# EAGLE board Photon-Battery-Shield-Panel-v10 (EAGLE 7.3.0), part 1 of 2
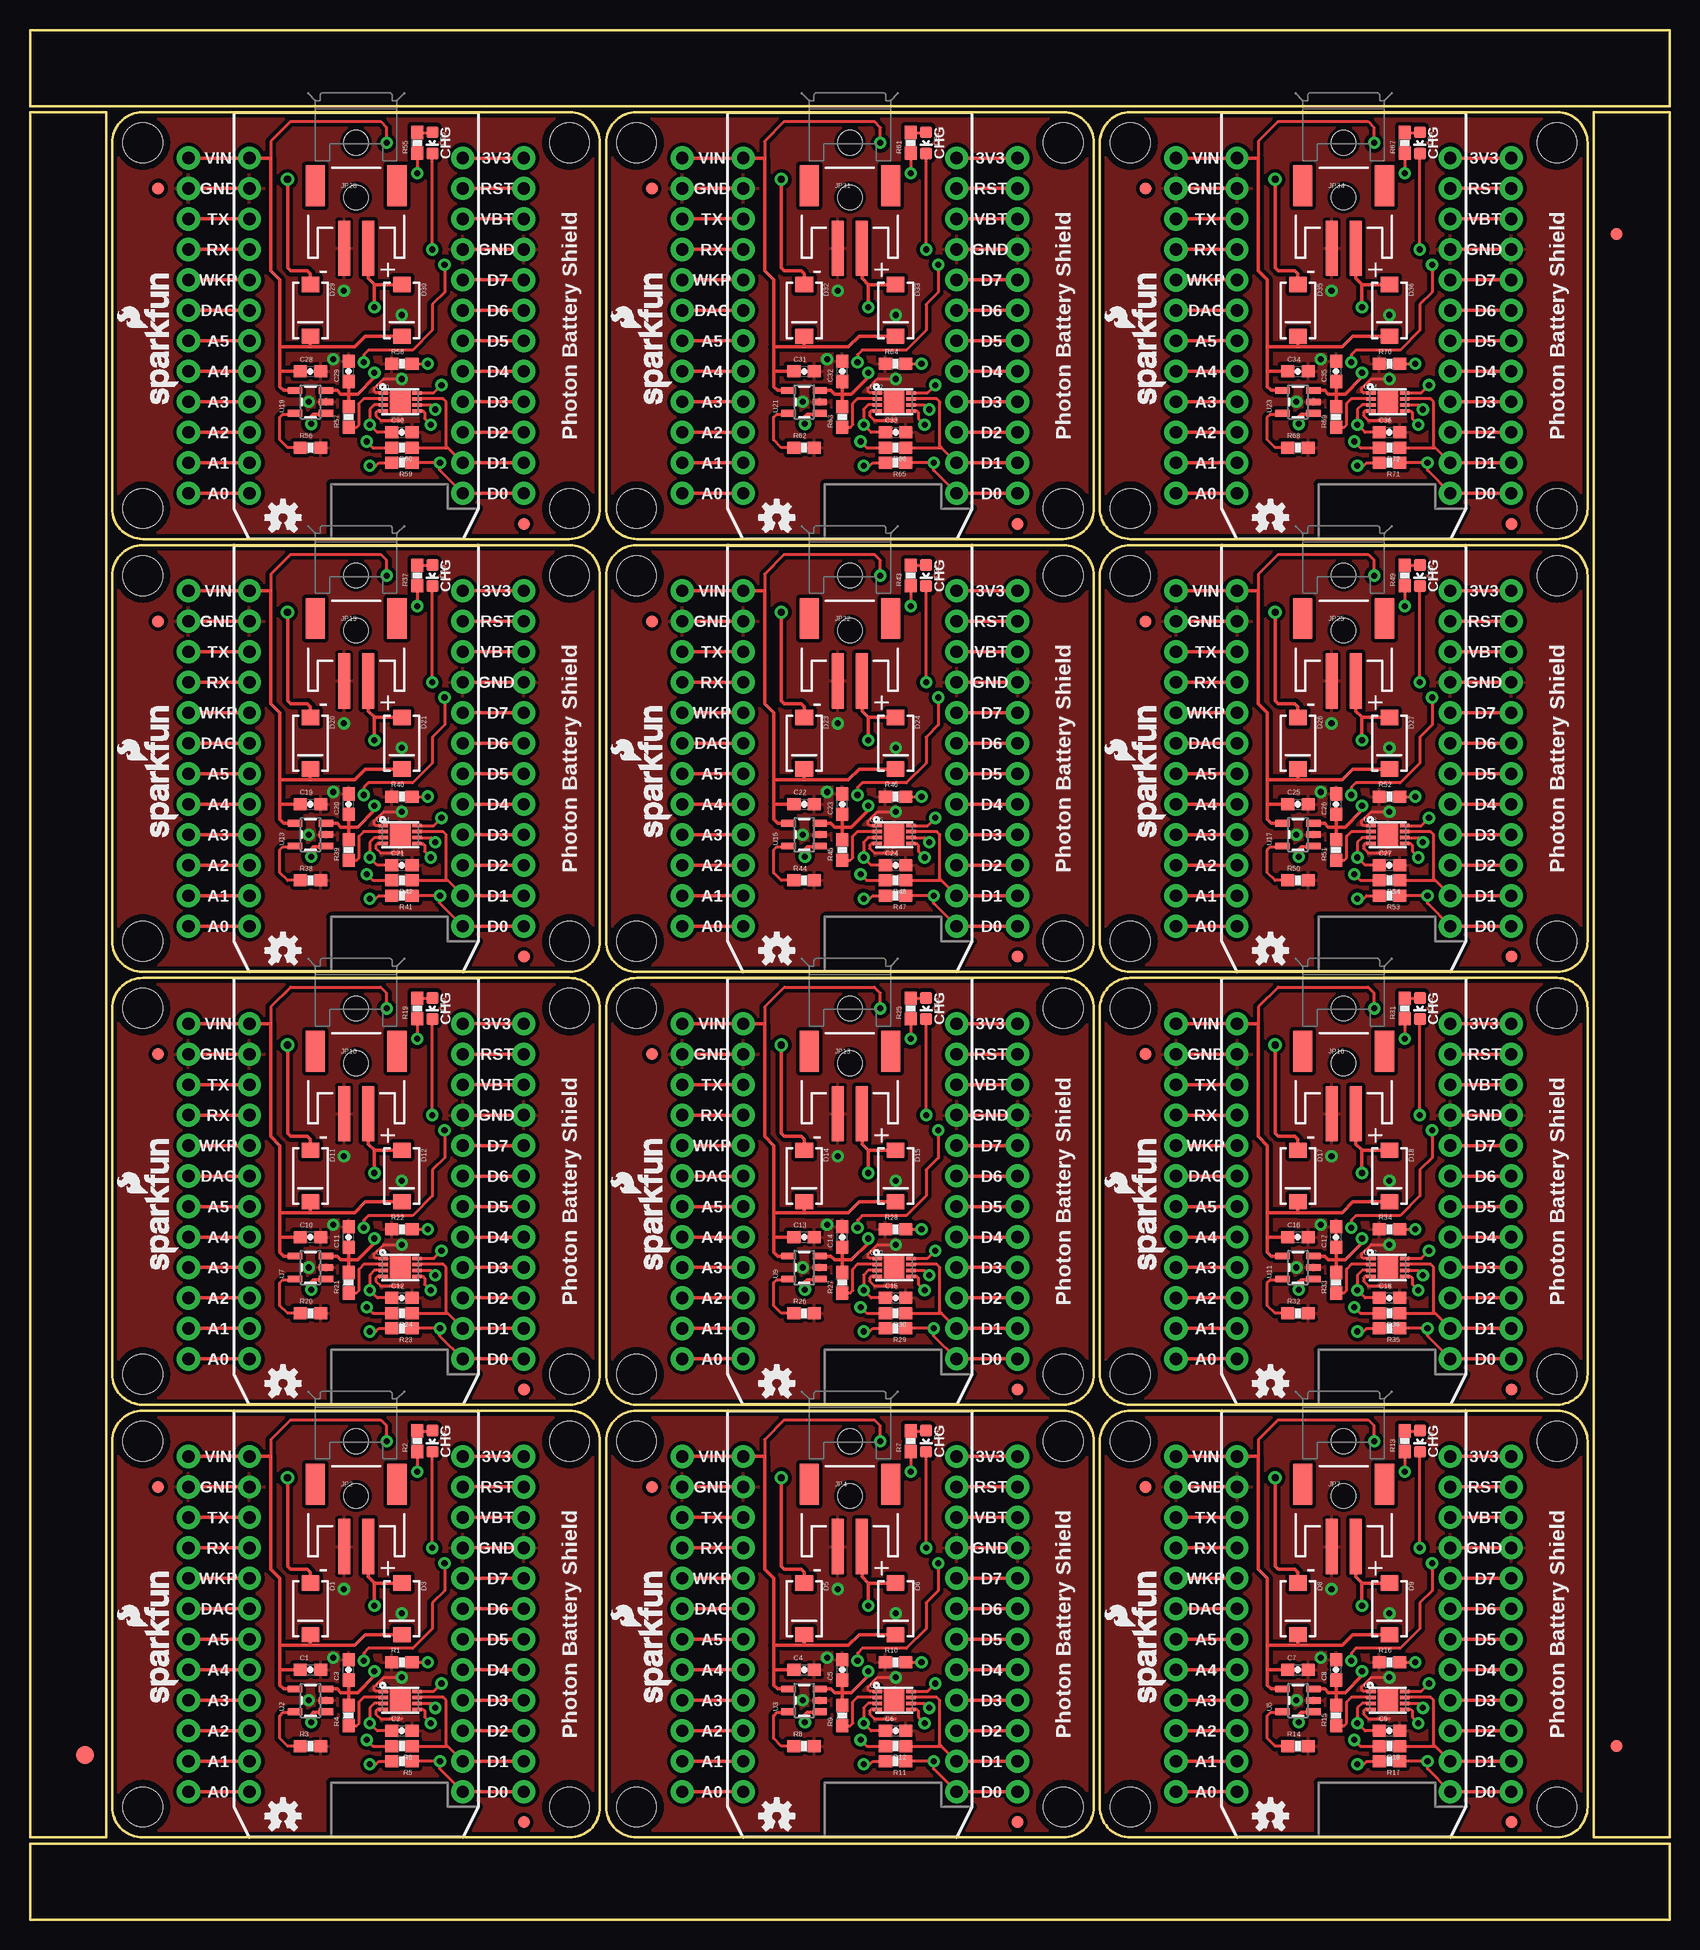
[diagram p0: board, top side]
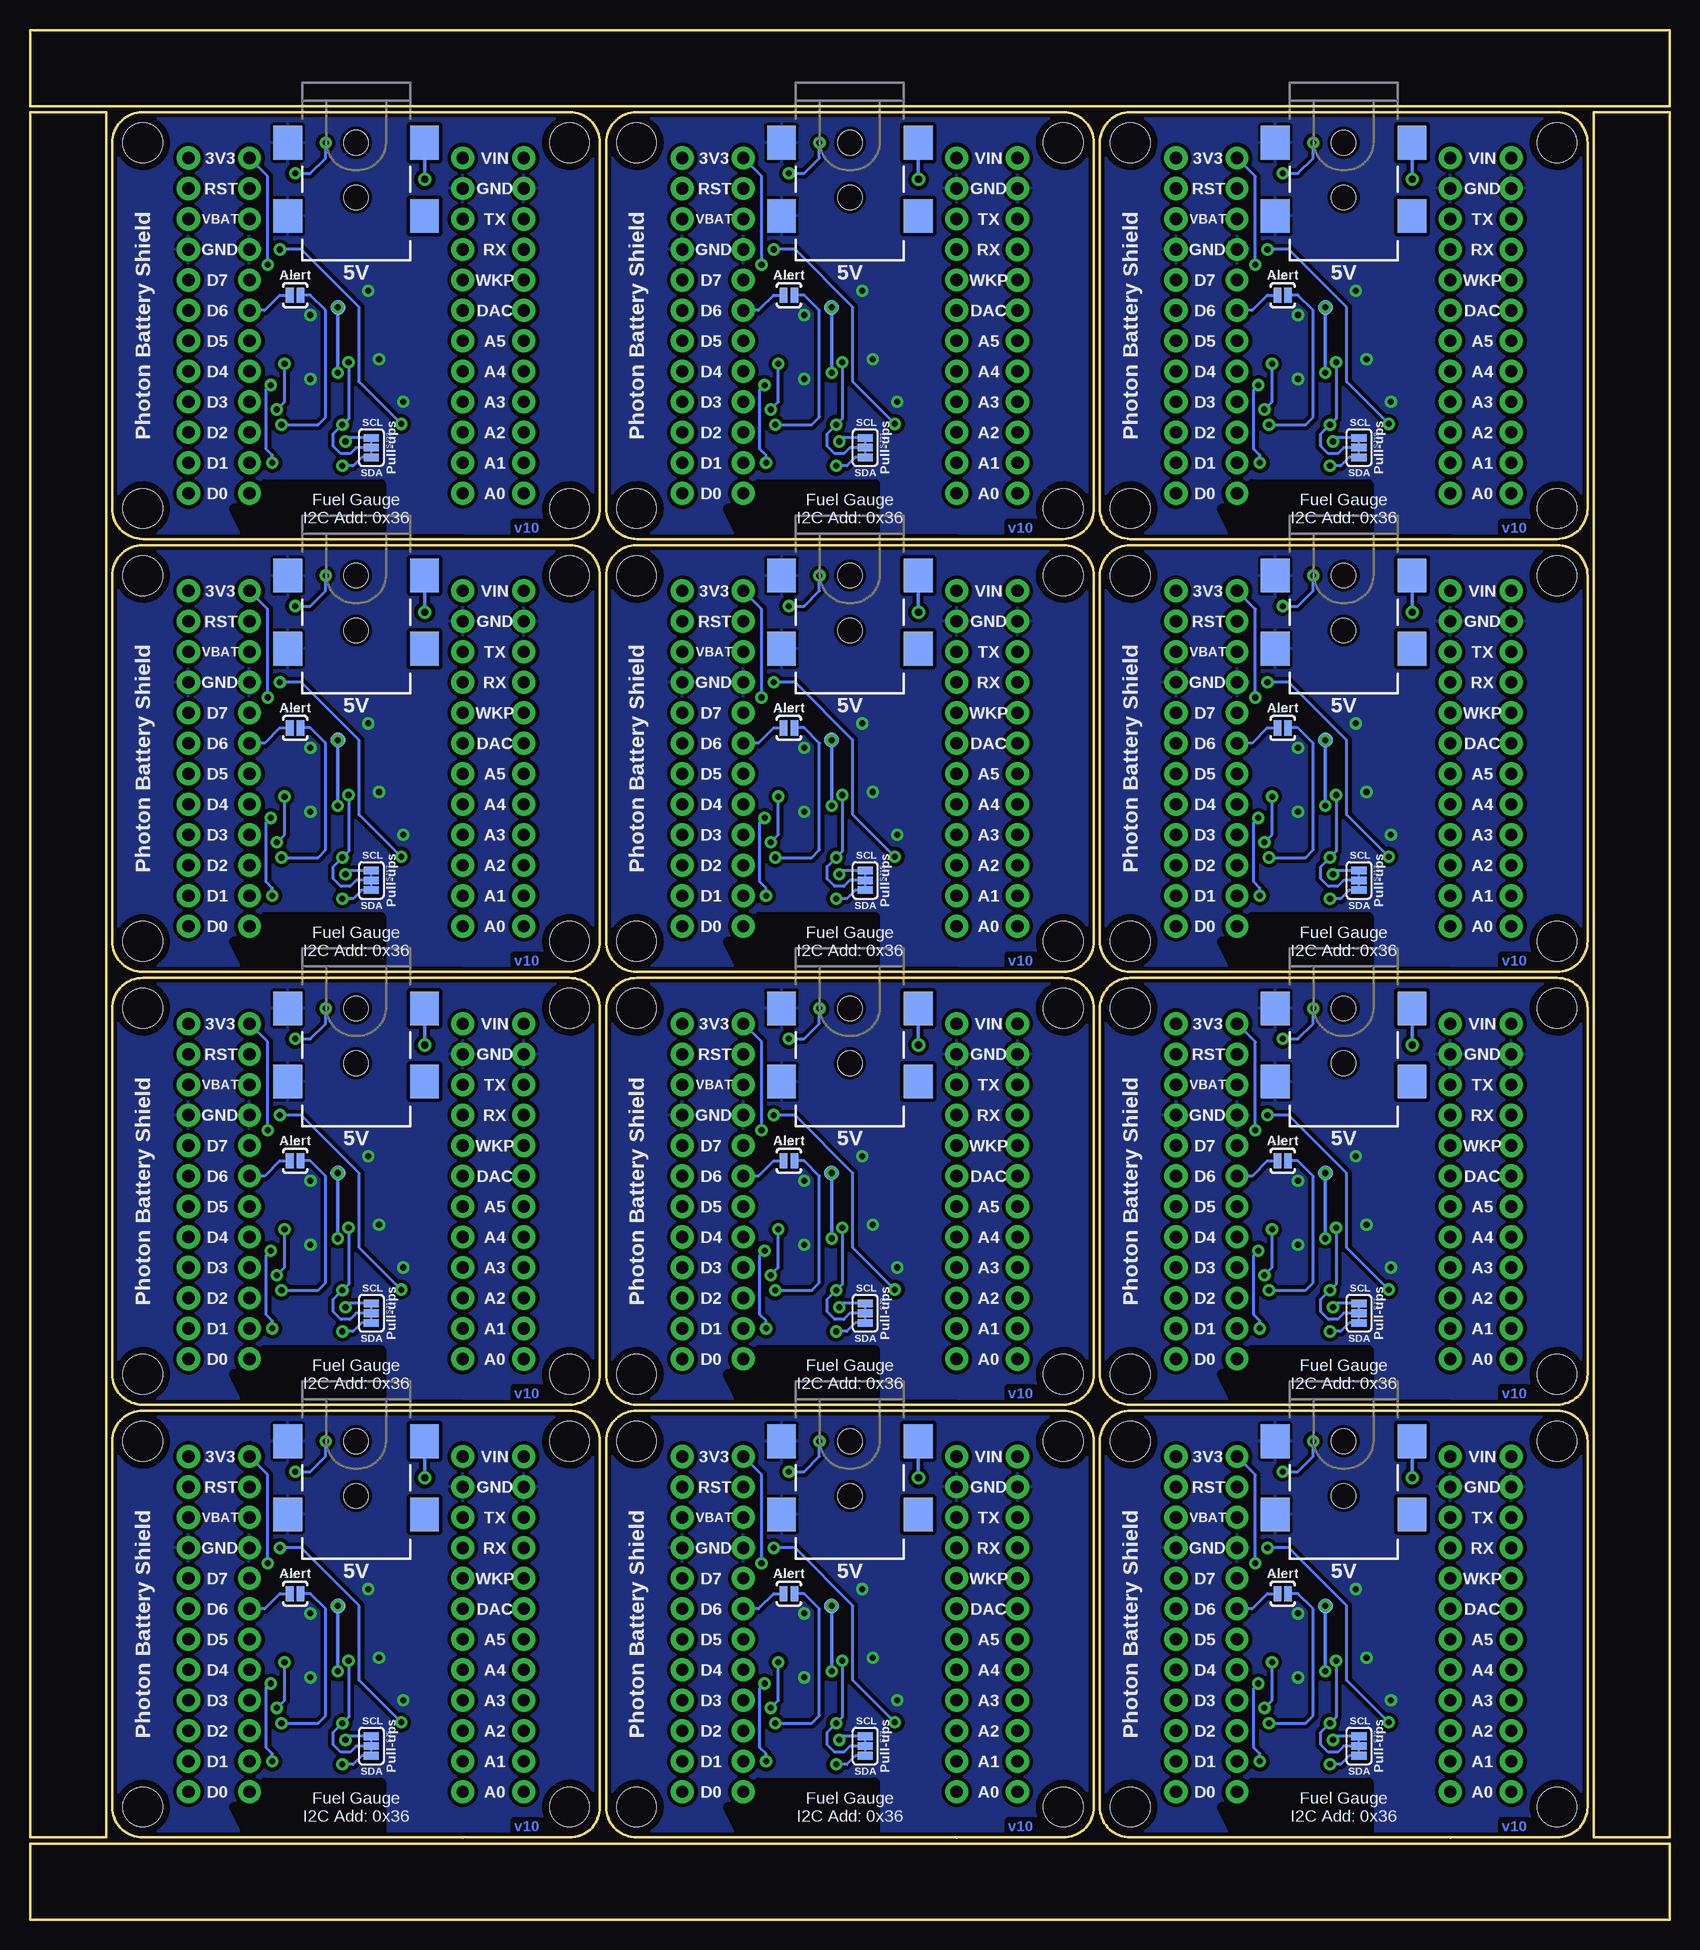
[diagram p1: board, bottom side, seen from below]

Size 136.65 x 157.48 mm. Coordinates in mm from the lower left corner, seen from the top.
Outline: 18.29,6.85 36.07,6.86
Outline: 59.44,6.85 77.22,6.86
Outline: 100.58,6.85 118.36,6.86
Outline: 18.29,42.92 36.07,42.93
Outline: 59.44,42.92 77.22,42.93
Outline: 100.58,42.92 118.36,42.93
Outline: 18.29,78.98 36.07,78.99
Outline: 59.44,78.98 77.22,78.99
Outline: 100.58,78.98 118.36,78.99
Outline: 18.29,115.05 36.07,115.06
Outline: 59.44,115.05 77.22,115.06
Outline: 100.58,115.05 118.36,115.06
Outline: 9.4,42.42 44.96,42.42 arc-90 47.5,39.88 47.5,9.4 arc-90 44.96,6.86 9.4,6.86 arc-90 6.86,9.4 6.86,39.88 arc-90 9.4,42.42
Outline: 50.55,42.42 86.11,42.42 arc-90 88.65,39.88 88.65,9.4 arc-90 86.11,6.86 50.55,6.86 arc-90 48.01,9.4 48.01,39.88 arc-90 50.55,42.42
Outline: 91.69,42.42 127.25,42.42 arc-90 129.79,39.88 129.79,9.4 arc-90 127.25,6.86 91.69,6.86 arc-90 89.15,9.4 89.15,39.88 arc-90 91.69,42.42
Outline: 9.4,78.49 44.96,78.49 arc-90 47.5,75.95 47.5,45.47 arc-90 44.96,42.93 9.4,42.93 arc-90 6.86,45.47 6.86,75.95 arc-90 9.4,78.49
Outline: 50.55,78.49 86.11,78.49 arc-90 88.65,75.95 88.65,45.47 arc-90 86.11,42.93 50.55,42.93 arc-90 48.01,45.47 48.01,75.95 arc-90 50.55,78.49
Outline: 91.69,78.49 127.25,78.49 arc-90 129.79,75.95 129.79,45.47 arc-90 127.25,42.93 91.69,42.93 arc-90 89.15,45.47 89.15,75.95 arc-90 91.69,78.49
Outline: 9.4,114.55 44.96,114.55 arc-90 47.5,112.01 47.5,81.53 arc-90 44.96,78.99 9.4,78.99 arc-90 6.86,81.53 6.86,112.01 arc-90 9.4,114.55
Outline: 50.55,114.55 86.11,114.55 arc-90 88.65,112.01 88.65,81.53 arc-90 86.11,78.99 50.55,78.99 arc-90 48.01,81.53 48.01,112.01 arc-90 50.55,114.55
Outline: 91.69,114.55 127.25,114.55 arc-90 129.79,112.01 129.79,81.53 arc-90 127.25,78.99 91.69,78.99 arc-90 89.15,81.53 89.15,112.01 arc-90 91.69,114.55
Outline: 9.4,150.62 44.96,150.62 arc-90 47.5,148.08 47.5,117.6 arc-90 44.96,115.06 9.4,115.06 arc-90 6.86,117.6 6.86,148.08 arc-90 9.4,150.62
Outline: 50.55,150.62 86.11,150.62 arc-90 88.65,148.08 88.65,117.6 arc-90 86.11,115.06 50.55,115.06 arc-90 48.01,117.6 48.01,148.08 arc-90 50.55,150.62
Outline: 91.69,150.62 127.25,150.62 arc-90 129.79,148.08 129.79,117.6 arc-90 127.25,115.06 91.69,115.06 arc-90 89.15,117.6 89.15,148.08 arc-90 91.69,150.62
Outline: 6.35,6.86 6.35,150.62 0,150.62 0,6.86 6.35,6.86
Outline: 0,0 136.65,0 136.65,6.35 0,6.35 0,0
Outline: 136.65,6.86 136.65,150.62 130.3,150.62 130.3,6.86 136.65,6.86
Outline: 136.65,157.48 0,157.48 0,151.13 136.65,151.13 136.65,157.48
Copper layers (1*16): Top 0.035mm / dielectric 1.5mm / Bottom 0.035mm
Design rules "SparkFun-2-layer": minimum track width 7mil, minimum drill 15mil, track to track 8mil, track to pad 8mil, pad to pad 8mil, via to via 8mil, smd to smd 8mil, copper to edge 8mil, drill to drill 8mil, minimum pad ring 12mil, minimum via ring 10mil, stop-mask expansion 4mil, vias tented up to drill 20mil, thermal gap 10mil
tRestrict: 24 lines

## Footprints (pad centres in the part's own frame; a part is rotated, then mirrored left to right if it is on the bottom)
0603-CAP = smd 1.1 x 1: 1 -0.85,0; 2 0.85,0
SMA-DIODE = smd 1.27 x 1.47: A -2.15,0; C 2.15,0
LED-0603 = smd 1 x 1: A 0,-0.877; C 0,0.877
FIDUCIAL-1.5X3 = smd 1.5 x 1.5: 1 0,0
FIDUCIAL-1X2 = smd 1 x 1: 1 0,0
POWER_JACK_SMD = smd 2.8 x 2.4: GND 0,-5.7; P$4 6.1,-5.7; VIN0 0,5.7; VIN1 6.1,5.7 | hole 2.032: 0,0; 4.572,0
JST-2-SMD = smd 1 x 4.6: 1 -1,-3.7; 2 1,-3.7 | smd 1.6 x 3.4: NC1 -3.4,1.5; NC2 3.4,1.5
SPARK_PHOTON_TEMPLATE_WIDE = drill 1.016 pad 1.905: 1 1.27,31.75; 2 1.27,29.21; 3 1.27,26.67; 4 1.27,24.13; 5 1.27,21.59; 6 1.27,19.05; 7 1.27,16.51; 8 1.27,13.97; 9 1.27,11.43; 10 1.27,8.89; 11 1.27,6.35; 12 1.27,3.81; 13 19.05,3.81; 14 19.05,6.35; 15 19.05,8.89; 16 19.05,11.43; 17 19.05,13.97; 18 19.05,16.51; 19 19.05,19.05; 20 19.05,21.59; 21 19.05,24.13; 22 19.05,26.67; 23 19.05,29.21; 24 19.05,31.75 | drill 1.016 pad 1.93: 3V3 24.13,31.75; A0 -3.81,3.81; A1 -3.81,6.35; A2 -3.81,8.89; A3 -3.81,11.43; A4 -3.81,13.97; A5 -3.81,16.51; D0 24.13,3.81; D1 24.13,6.35; D2 24.13,8.89; D3 24.13,11.43; D4 24.13,13.97; D5 24.13,16.51; D6 24.13,19.05; D7 24.13,21.59; DAC -3.81,19.05; GND@0 -3.81,29.21; GND@2 24.13,24.13; RST 24.13,29.21; RX -3.81,24.13; TX -3.81,26.67; VBAT 24.13,26.67; VIN -3.81,31.75; WKP -3.81,21.59 | hole 3.302: -7.62,33.02; 27.94,33.02; -7.62,2.54; 27.94,2.54
0603-RES = smd 1.1 x 1: 1 -0.85,0; 2 0.85,0
PAD-JUMPER-2-NO_YES_SILK = smd 0.635 x 1.27: 1 -0.45,0; 2 0.45,0
PAD-JUMPER-3-3OF3_NC_BY_TRACE_YES_SILK_FULL_BOX = smd 0.635 x 1.27: 1 -0.813,0; 2 0,0; 3 0.813,0
PAD.03X.05 = smd 1.27 x 1.27: P$1 0,0
TDFN-8 = smd 0.8 x 0.3: 1 -1.4,0.75; 2 -1.4,0.25; 3 -1.4,-0.25; 4 -1.4,-0.75; 5 1.4,-0.75; 6 1.4,-0.25; 7 1.4,0.25; 8 1.4,0.75 | smd 1.73 x 1.88: EP 0,0
SOT23-5 = smd 0.55 x 1.2: 1 -0.95,-1.3; 2 0,-1.3; 3 0.95,-1.3; 4 0.95,1.3; 5 -0.95,1.3

## Placement (x,y rotation side)
C1  4.7uF  [0603-CAP]  23.37,20.83 0 top
C2  1.0uF  [0603-CAP]  30.99,15.75 0 top
C3  4.7uF  [0603-CAP]  26.54,20.83 90 top
C4  4.7uF  [0603-CAP]  64.52,20.83 0 top
C5  4.7uF  [0603-CAP]  67.69,20.83 90 top
C6  1.0uF  [0603-CAP]  72.14,15.75 0 top
C7  4.7uF  [0603-CAP]  105.66,20.83 0 top
C8  4.7uF  [0603-CAP]  108.84,20.83 90 top
C9  1.0uF  [0603-CAP]  113.28,15.75 0 top
C10  4.7uF  [0603-CAP]  23.37,56.9 0 top
C11  4.7uF  [0603-CAP]  26.54,56.9 90 top
C12  1.0uF  [0603-CAP]  30.99,51.82 0 top
C13  4.7uF  [0603-CAP]  64.52,56.9 0 top
C14  4.7uF  [0603-CAP]  67.69,56.9 90 top
C15  1.0uF  [0603-CAP]  72.14,51.82 0 top
C16  4.7uF  [0603-CAP]  105.66,56.9 0 top
C17  4.7uF  [0603-CAP]  108.84,56.9 90 top
C18  1.0uF  [0603-CAP]  113.28,51.82 0 top
C19  4.7uF  [0603-CAP]  23.37,92.96 0 top
C20  4.7uF  [0603-CAP]  26.54,92.96 90 top
C21  1.0uF  [0603-CAP]  30.99,87.88 0 top
C22  4.7uF  [0603-CAP]  64.52,92.96 0 top
C23  4.7uF  [0603-CAP]  67.69,92.96 90 top
C24  1.0uF  [0603-CAP]  72.14,87.88 0 top
C25  4.7uF  [0603-CAP]  105.66,92.96 0 top
C26  4.7uF  [0603-CAP]  108.84,92.96 90 top
C27  1.0uF  [0603-CAP]  113.28,87.88 0 top
C28  4.7uF  [0603-CAP]  23.37,129.03 0 top
C29  4.7uF  [0603-CAP]  26.54,129.03 90 top
C30  1.0uF  [0603-CAP]  30.99,123.95 0 top
C31  4.7uF  [0603-CAP]  64.52,129.03 0 top
C32  4.7uF  [0603-CAP]  67.69,129.03 90 top
C33  1.0uF  [0603-CAP]  72.14,123.95 0 top
C34  4.7uF  [0603-CAP]  105.66,129.03 0 top
C35  4.7uF  [0603-CAP]  108.84,129.03 90 top
C36  1.0uF  [0603-CAP]  113.28,123.95 0 top
D1  MBRA140  [SMA-DIODE]  23.37,25.91 270 top
D2  RED  [LED-0603]  33.53,39.88 180 top
D3  MBRA140  [SMA-DIODE]  30.99,25.91 270 top
D4  RED  [LED-0603]  74.68,39.88 180 top
D5  MBRA140  [SMA-DIODE]  64.52,25.91 270 top
D6  MBRA140  [SMA-DIODE]  72.14,25.91 270 top
D7  RED  [LED-0603]  115.82,39.88 180 top
D8  MBRA140  [SMA-DIODE]  105.66,25.91 270 top
D9  MBRA140  [SMA-DIODE]  113.28,25.91 270 top
D10  RED  [LED-0603]  33.53,75.95 180 top
D11  MBRA140  [SMA-DIODE]  23.37,61.98 270 top
D12  MBRA140  [SMA-DIODE]  30.99,61.98 270 top
D13  RED  [LED-0603]  74.68,75.95 180 top
D14  MBRA140  [SMA-DIODE]  64.52,61.98 270 top
D15  MBRA140  [SMA-DIODE]  72.14,61.98 270 top
D16  RED  [LED-0603]  115.82,75.95 180 top
D17  MBRA140  [SMA-DIODE]  105.66,61.98 270 top
D18  MBRA140  [SMA-DIODE]  113.28,61.98 270 top
D19  RED  [LED-0603]  33.53,112.01 180 top
D20  MBRA140  [SMA-DIODE]  23.37,98.04 270 top
D21  MBRA140  [SMA-DIODE]  30.99,98.04 270 top
D22  RED  [LED-0603]  74.68,112.01 180 top
D23  MBRA140  [SMA-DIODE]  64.52,98.04 270 top
D24  MBRA140  [SMA-DIODE]  72.14,98.04 270 top
D25  RED  [LED-0603]  115.82,112.01 180 top
D26  MBRA140  [SMA-DIODE]  105.66,98.04 270 top
D27  MBRA140  [SMA-DIODE]  113.28,98.04 270 top
D28  RED  [LED-0603]  33.53,148.08 180 top
D29  MBRA140  [SMA-DIODE]  23.37,134.11 270 top
D30  MBRA140  [SMA-DIODE]  30.99,134.11 270 top
D31  RED  [LED-0603]  74.68,148.08 180 top
D32  MBRA140  [SMA-DIODE]  64.52,134.11 270 top
D33  MBRA140  [SMA-DIODE]  72.14,134.11 270 top
D34  RED  [LED-0603]  115.82,148.08 180 top
D35  MBRA140  [SMA-DIODE]  105.66,134.11 270 top
D36  MBRA140  [SMA-DIODE]  113.28,134.11 270 top
E$1  [FIDUCIAL-1.5X3]  4.57,13.72 0 top
E$4  [FIDUCIAL-1X2]  132.21,14.48 0 top
E$5  [FIDUCIAL-1X2]  132.21,140.46 180 top
FID1  FIDUCIAL1X2  [FIDUCIAL-1X2]  41.15,8.13 0 top
FID2  FIDUCIAL1X2  [FIDUCIAL-1X2]  10.67,36.07 0 top
FID3  FIDUCIAL1X2  [FIDUCIAL-1X2]  82.3,8.13 0 top
FID4  FIDUCIAL1X2  [FIDUCIAL-1X2]  51.82,36.07 0 top
FID5  FIDUCIAL1X2  [FIDUCIAL-1X2]  123.44,8.13 0 top
FID6  FIDUCIAL1X2  [FIDUCIAL-1X2]  92.96,36.07 0 top
FID7  FIDUCIAL1X2  [FIDUCIAL-1X2]  41.15,44.2 0 top
FID8  FIDUCIAL1X2  [FIDUCIAL-1X2]  10.67,72.14 0 top
FID9  FIDUCIAL1X2  [FIDUCIAL-1X2]  82.3,44.2 0 top
FID10  FIDUCIAL1X2  [FIDUCIAL-1X2]  51.82,72.14 0 top
FID11  FIDUCIAL1X2  [FIDUCIAL-1X2]  123.44,44.2 0 top
FID12  FIDUCIAL1X2  [FIDUCIAL-1X2]  92.96,72.14 0 top
FID13  FIDUCIAL1X2  [FIDUCIAL-1X2]  41.15,80.26 0 top
FID14  FIDUCIAL1X2  [FIDUCIAL-1X2]  10.67,108.2 0 top
FID15  FIDUCIAL1X2  [FIDUCIAL-1X2]  82.3,80.26 0 top
FID16  FIDUCIAL1X2  [FIDUCIAL-1X2]  51.82,108.2 0 top
FID17  FIDUCIAL1X2  [FIDUCIAL-1X2]  123.44,80.26 0 top
FID18  FIDUCIAL1X2  [FIDUCIAL-1X2]  92.96,108.2 0 top
FID19  FIDUCIAL1X2  [FIDUCIAL-1X2]  41.15,116.33 0 top
FID20  FIDUCIAL1X2  [FIDUCIAL-1X2]  10.67,144.27 0 top
FID21  FIDUCIAL1X2  [FIDUCIAL-1X2]  82.3,116.33 0 top
FID22  FIDUCIAL1X2  [FIDUCIAL-1X2]  51.82,144.27 0 top
FID23  FIDUCIAL1X2  [FIDUCIAL-1X2]  123.44,116.33 0 top
FID24  FIDUCIAL1X2  [FIDUCIAL-1X2]  92.96,144.27 0 top
JP1  5.5x2.1mm Barrel  [POWER_JACK_SMD]  27.18,39.88 270 bottom
JP2  [JST-2-SMD]  27.18,34.8 0 top
JP3  SPARK_PHOTONTEMPLATE_WIDE  [SPARK_PHOTON_TEMPLATE_WIDE]  17.02,6.86 0 top
JP4  [JST-2-SMD]  68.33,34.8 0 top
JP5  SPARK_PHOTONTEMPLATE_WIDE  [SPARK_PHOTON_TEMPLATE_WIDE]  58.17,6.86 0 top
JP6  5.5x2.1mm Barrel  [POWER_JACK_SMD]  68.33,39.88 270 bottom
JP7  [JST-2-SMD]  109.47,34.8 0 top
JP8  SPARK_PHOTONTEMPLATE_WIDE  [SPARK_PHOTON_TEMPLATE_WIDE]  99.31,6.86 0 top
JP9  5.5x2.1mm Barrel  [POWER_JACK_SMD]  109.47,39.88 270 bottom
JP10  [JST-2-SMD]  27.18,70.87 0 top
JP11  SPARK_PHOTONTEMPLATE_WIDE  [SPARK_PHOTON_TEMPLATE_WIDE]  17.02,42.93 0 top
JP12  5.5x2.1mm Barrel  [POWER_JACK_SMD]  27.18,75.95 270 bottom
JP13  [JST-2-SMD]  68.33,70.87 0 top
JP14  SPARK_PHOTONTEMPLATE_WIDE  [SPARK_PHOTON_TEMPLATE_WIDE]  58.17,42.93 0 top
JP15  5.5x2.1mm Barrel  [POWER_JACK_SMD]  68.33,75.95 270 bottom
JP16  [JST-2-SMD]  109.47,70.87 0 top
JP17  SPARK_PHOTONTEMPLATE_WIDE  [SPARK_PHOTON_TEMPLATE_WIDE]  99.31,42.93 0 top
JP18  5.5x2.1mm Barrel  [POWER_JACK_SMD]  109.47,75.95 270 bottom
JP19  [JST-2-SMD]  27.18,106.93 0 top
JP20  SPARK_PHOTONTEMPLATE_WIDE  [SPARK_PHOTON_TEMPLATE_WIDE]  17.02,78.99 0 top
JP21  5.5x2.1mm Barrel  [POWER_JACK_SMD]  27.18,112.01 270 bottom
JP22  [JST-2-SMD]  68.33,106.93 0 top
JP23  SPARK_PHOTONTEMPLATE_WIDE  [SPARK_PHOTON_TEMPLATE_WIDE]  58.17,78.99 0 top
JP24  5.5x2.1mm Barrel  [POWER_JACK_SMD]  68.33,112.01 270 bottom
JP25  [JST-2-SMD]  109.47,106.93 0 top
JP26  SPARK_PHOTONTEMPLATE_WIDE  [SPARK_PHOTON_TEMPLATE_WIDE]  99.31,78.99 0 top
JP27  5.5x2.1mm Barrel  [POWER_JACK_SMD]  109.47,112.01 270 bottom
JP28  [JST-2-SMD]  27.18,143 0 top
JP29  SPARK_PHOTONTEMPLATE_WIDE  [SPARK_PHOTON_TEMPLATE_WIDE]  17.02,115.06 0 top
JP30  5.5x2.1mm Barrel  [POWER_JACK_SMD]  27.18,148.08 270 bottom
JP31  [JST-2-SMD]  68.33,143 0 top
JP32  SPARK_PHOTONTEMPLATE_WIDE  [SPARK_PHOTON_TEMPLATE_WIDE]  58.17,115.06 0 top
JP33  5.5x2.1mm Barrel  [POWER_JACK_SMD]  68.33,148.08 270 bottom
JP34  [JST-2-SMD]  109.47,143 0 top
JP35  SPARK_PHOTONTEMPLATE_WIDE  [SPARK_PHOTON_TEMPLATE_WIDE]  99.31,115.06 0 top
JP36  5.5x2.1mm Barrel  [POWER_JACK_SMD]  109.47,148.08 270 bottom
LOGO1  OSHW-LOGOS  [OSHW-LOGO-S]  62.23,8.64 0 top
LOGO2  OSHW-LOGOS  [OSHW-LOGO-S]  21.08,8.64 0 top
LOGO3  SFE_LOGO_NAME_FLAME.1_INCH  [SFE_LOGO_NAME_FLAME_.1]  12.45,17.65 90 top
LOGO4  SFE_LOGO_NAME_FLAME.1_INCH  [SFE_LOGO_NAME_FLAME_.1]  53.59,17.65 90 top
LOGO5  OSHW-LOGOS  [OSHW-LOGO-S]  103.38,8.64 0 top
LOGO6  SFE_LOGO_NAME_FLAME.1_INCH  [SFE_LOGO_NAME_FLAME_.1]  94.74,17.65 90 top
LOGO7  OSHW-LOGOS  [OSHW-LOGO-S]  21.08,44.7 0 top
LOGO8  SFE_LOGO_NAME_FLAME.1_INCH  [SFE_LOGO_NAME_FLAME_.1]  12.45,53.72 90 top
LOGO9  OSHW-LOGOS  [OSHW-LOGO-S]  62.23,44.7 0 top
LOGO10  SFE_LOGO_NAME_FLAME.1_INCH  [SFE_LOGO_NAME_FLAME_.1]  53.59,53.72 90 top
LOGO11  OSHW-LOGOS  [OSHW-LOGO-S]  103.38,44.7 0 top
LOGO12  SFE_LOGO_NAME_FLAME.1_INCH  [SFE_LOGO_NAME_FLAME_.1]  94.74,53.72 90 top
LOGO13  OSHW-LOGOS  [OSHW-LOGO-S]  21.08,80.77 0 top
LOGO14  SFE_LOGO_NAME_FLAME.1_INCH  [SFE_LOGO_NAME_FLAME_.1]  12.45,89.79 90 top
LOGO15  OSHW-LOGOS  [OSHW-LOGO-S]  62.23,80.77 0 top
LOGO16  SFE_LOGO_NAME_FLAME.1_INCH  [SFE_LOGO_NAME_FLAME_.1]  53.59,89.79 90 top
LOGO17  OSHW-LOGOS  [OSHW-LOGO-S]  103.38,80.77 0 top
LOGO18  SFE_LOGO_NAME_FLAME.1_INCH  [SFE_LOGO_NAME_FLAME_.1]  94.74,89.79 90 top
LOGO19  OSHW-LOGOS  [OSHW-LOGO-S]  21.08,116.84 0 top
LOGO20  SFE_LOGO_NAME_FLAME.1_INCH  [SFE_LOGO_NAME_FLAME_.1]  12.45,125.86 90 top
LOGO21  OSHW-LOGOS  [OSHW-LOGO-S]  62.23,116.84 0 top
LOGO22  SFE_LOGO_NAME_FLAME.1_INCH  [SFE_LOGO_NAME_FLAME_.1]  53.59,125.86 90 top
LOGO23  OSHW-LOGOS  [OSHW-LOGO-S]  103.38,116.84 0 top
LOGO24  SFE_LOGO_NAME_FLAME.1_INCH  [SFE_LOGO_NAME_FLAME_.1]  94.74,125.86 90 top
R1  1K  [0603-RES]  30.99,21.46 0 top
R2  330  [0603-RES]  32.26,39.88 90 top
R3  2.0k  [0603-RES]  23.37,14.48 0 top
R4  1K  [0603-RES]  26.54,17.02 90 top
R5  10K  [0603-RES]  30.99,13.21 180 top
R6  10K  [0603-RES]  30.99,14.48 180 top
R7  330  [0603-RES]  73.41,39.88 90 top
R8  2.0k  [0603-RES]  64.52,14.48 0 top
R9  1K  [0603-RES]  67.69,17.02 90 top
R10  1K  [0603-RES]  72.14,21.46 0 top
R11  10K  [0603-RES]  72.14,13.21 180 top
R12  10K  [0603-RES]  72.14,14.48 180 top
R13  330  [0603-RES]  114.55,39.88 90 top
R14  2.0k  [0603-RES]  105.66,14.48 0 top
R15  1K  [0603-RES]  108.84,17.02 90 top
R16  1K  [0603-RES]  113.28,21.46 0 top
R17  10K  [0603-RES]  113.28,13.21 180 top
R18  10K  [0603-RES]  113.28,14.48 180 top
R19  330  [0603-RES]  32.26,75.95 90 top
R20  2.0k  [0603-RES]  23.37,50.55 0 top
R21  1K  [0603-RES]  26.54,53.09 90 top
R22  1K  [0603-RES]  30.99,57.53 0 top
R23  10K  [0603-RES]  30.99,49.28 180 top
R24  10K  [0603-RES]  30.99,50.55 180 top
R25  330  [0603-RES]  73.41,75.95 90 top
R26  2.0k  [0603-RES]  64.52,50.55 0 top
R27  1K  [0603-RES]  67.69,53.09 90 top
R28  1K  [0603-RES]  72.14,57.53 0 top
R29  10K  [0603-RES]  72.14,49.28 180 top
R30  10K  [0603-RES]  72.14,50.55 180 top
R31  330  [0603-RES]  114.55,75.95 90 top
R32  2.0k  [0603-RES]  105.66,50.55 0 top
R33  1K  [0603-RES]  108.84,53.09 90 top
R34  1K  [0603-RES]  113.28,57.53 0 top
R35  10K  [0603-RES]  113.28,49.28 180 top
R36  10K  [0603-RES]  113.28,50.55 180 top
R37  330  [0603-RES]  32.26,112.01 90 top
R38  2.0k  [0603-RES]  23.37,86.61 0 top
R39  1K  [0603-RES]  26.54,89.15 90 top
R40  1K  [0603-RES]  30.99,93.6 0 top
R41  10K  [0603-RES]  30.99,85.34 180 top
R42  10K  [0603-RES]  30.99,86.61 180 top
R43  330  [0603-RES]  73.41,112.01 90 top
R44  2.0k  [0603-RES]  64.52,86.61 0 top
R45  1K  [0603-RES]  67.69,89.15 90 top
R46  1K  [0603-RES]  72.14,93.6 0 top
R47  10K  [0603-RES]  72.14,85.34 180 top
R48  10K  [0603-RES]  72.14,86.61 180 top
R49  330  [0603-RES]  114.55,112.01 90 top
R50  2.0k  [0603-RES]  105.66,86.61 0 top
R51  1K  [0603-RES]  108.84,89.15 90 top
R52  1K  [0603-RES]  113.28,93.6 0 top
R53  10K  [0603-RES]  113.28,85.34 180 top
R54  10K  [0603-RES]  113.28,86.61 180 top
R55  330  [0603-RES]  32.26,148.08 90 top
R56  2.0k  [0603-RES]  23.37,122.68 0 top
R57  1K  [0603-RES]  26.54,125.22 90 top
R58  1K  [0603-RES]  30.99,129.67 0 top
R59  10K  [0603-RES]  30.99,121.41 180 top
R60  10K  [0603-RES]  30.99,122.68 180 top
R61  330  [0603-RES]  73.41,148.08 90 top
R62  2.0k  [0603-RES]  64.52,122.68 0 top
R63  1K  [0603-RES]  67.69,125.22 90 top
R64  1K  [0603-RES]  72.14,129.67 0 top
R65  10K  [0603-RES]  72.14,121.41 180 top
R66  10K  [0603-RES]  72.14,122.68 180 top
R67  330  [0603-RES]  114.55,148.08 90 top
R68  2.0k  [0603-RES]  105.66,122.68 0 top
R69  1K  [0603-RES]  108.84,125.22 90 top
R70  1K  [0603-RES]  113.28,129.67 0 top
R71  10K  [0603-RES]  113.28,121.41 180 top
R72  10K  [0603-RES]  113.28,122.68 180 top
SJ1  alert  [PAD-JUMPER-2-NO_YES_SILK]  32.26,27.18 0 bottom
SJ2  [PAD-JUMPER-3-3OF3_NC_BY_TRACE_YES_SILK_FULL_BOX]  25.91,14.48 270 bottom
SJ3  [PAD-JUMPER-3-3OF3_NC_BY_TRACE_YES_SILK_FULL_BOX]  67.06,14.48 270 bottom
SJ4  alert  [PAD-JUMPER-2-NO_YES_SILK]  73.41,27.18 0 bottom
SJ5  [PAD-JUMPER-3-3OF3_NC_BY_TRACE_YES_SILK_FULL_BOX]  108.2,14.48 270 bottom
SJ6  alert  [PAD-JUMPER-2-NO_YES_SILK]  114.55,27.18 0 bottom
SJ7  [PAD-JUMPER-3-3OF3_NC_BY_TRACE_YES_SILK_FULL_BOX]  25.91,50.55 270 bottom
SJ8  alert  [PAD-JUMPER-2-NO_YES_SILK]  32.26,63.25 0 bottom
SJ9  [PAD-JUMPER-3-3OF3_NC_BY_TRACE_YES_SILK_FULL_BOX]  67.06,50.55 270 bottom
SJ10  alert  [PAD-JUMPER-2-NO_YES_SILK]  73.41,63.25 0 bottom
SJ11  [PAD-JUMPER-3-3OF3_NC_BY_TRACE_YES_SILK_FULL_BOX]  108.2,50.55 270 bottom
SJ12  alert  [PAD-JUMPER-2-NO_YES_SILK]  114.55,63.25 0 bottom
SJ13  [PAD-JUMPER-3-3OF3_NC_BY_TRACE_YES_SILK_FULL_BOX]  25.91,86.61 270 bottom
SJ14  alert  [PAD-JUMPER-2-NO_YES_SILK]  32.26,99.31 0 bottom
SJ15  [PAD-JUMPER-3-3OF3_NC_BY_TRACE_YES_SILK_FULL_BOX]  67.06,86.61 270 bottom
SJ16  alert  [PAD-JUMPER-2-NO_YES_SILK]  73.41,99.31 0 bottom
SJ17  [PAD-JUMPER-3-3OF3_NC_BY_TRACE_YES_SILK_FULL_BOX]  108.2,86.61 270 bottom
SJ18  alert  [PAD-JUMPER-2-NO_YES_SILK]  114.55,99.31 0 bottom
SJ19  [PAD-JUMPER-3-3OF3_NC_BY_TRACE_YES_SILK_FULL_BOX]  25.91,122.68 270 bottom
SJ20  alert  [PAD-JUMPER-2-NO_YES_SILK]  32.26,135.38 0 bottom
SJ21  [PAD-JUMPER-3-3OF3_NC_BY_TRACE_YES_SILK_FULL_BOX]  67.06,122.68 270 bottom
SJ22  alert  [PAD-JUMPER-2-NO_YES_SILK]  73.41,135.38 0 bottom
SJ23  [PAD-JUMPER-3-3OF3_NC_BY_TRACE_YES_SILK_FULL_BOX]  108.2,122.68 270 bottom
SJ24  alert  [PAD-JUMPER-2-NO_YES_SILK]  114.55,135.38 0 bottom
TP1  TEST-POINT3X5  [PAD.03X.05]  28.7,26.16 0 bottom
TP2  TEST-POINT3X5  [PAD.03X.05]  69.85,26.16 0 bottom
TP3  TEST-POINT3X5  [PAD.03X.05]  111,26.16 0 bottom
TP4  TEST-POINT3X5  [PAD.03X.05]  28.7,62.23 0 bottom
TP5  TEST-POINT3X5  [PAD.03X.05]  69.85,62.23 0 bottom
TP6  TEST-POINT3X5  [PAD.03X.05]  111,62.23 0 bottom
TP7  TEST-POINT3X5  [PAD.03X.05]  28.7,98.3 0 bottom
TP8  TEST-POINT3X5  [PAD.03X.05]  69.85,98.3 0 bottom
TP9  TEST-POINT3X5  [PAD.03X.05]  111,98.3 0 bottom
TP10  TEST-POINT3X5  [PAD.03X.05]  28.7,134.37 0 bottom
TP11  TEST-POINT3X5  [PAD.03X.05]  69.85,134.37 0 bottom
TP12  TEST-POINT3X5  [PAD.03X.05]  111,134.37 0 bottom
U1  MAX1704X  [TDFN-8]  30.86,18.29 0 top
U2  MCP73831  [SOT23-5]  23.37,18.29 90 top
U3  MCP73831  [SOT23-5]  64.52,18.29 90 top
U4  MAX1704X  [TDFN-8]  72.01,18.29 0 top
U5  MCP73831  [SOT23-5]  105.66,18.29 90 top
U6  MAX1704X  [TDFN-8]  113.16,18.29 0 top
U7  MCP73831  [SOT23-5]  23.37,54.36 90 top
U8  MAX1704X  [TDFN-8]  30.86,54.36 0 top
U9  MCP73831  [SOT23-5]  64.52,54.36 90 top
U10  MAX1704X  [TDFN-8]  72.01,54.36 0 top
U11  MCP73831  [SOT23-5]  105.66,54.36 90 top
U12  MAX1704X  [TDFN-8]  113.16,54.36 0 top
U13  MCP73831  [SOT23-5]  23.37,90.42 90 top
U14  MAX1704X  [TDFN-8]  30.86,90.42 0 top
U15  MCP73831  [SOT23-5]  64.52,90.42 90 top
U16  MAX1704X  [TDFN-8]  72.01,90.42 0 top
U17  MCP73831  [SOT23-5]  105.66,90.42 90 top
U18  MAX1704X  [TDFN-8]  113.16,90.42 0 top
U19  MCP73831  [SOT23-5]  23.37,126.49 90 top
U20  MAX1704X  [TDFN-8]  30.86,126.49 0 top
U21  MCP73831  [SOT23-5]  64.52,126.49 90 top
U22  MAX1704X  [TDFN-8]  72.01,126.49 0 top
U23  MCP73831  [SOT23-5]  105.66,126.49 90 top
U24  MAX1704X  [TDFN-8]  113.16,126.49 0 top

## Library data of the parts
C1 C3-C5 C7 C8 C10 C11 C13 C14 C16 C17 C19 C20 C22 C23 C25 C26 C28 C29 C31 C32 C34 C35 = SparkFun-Capacitors; PROD_ID: CAP-08280
C2 C6 C9 C12 C15 C18 C21 C24 C27 C30 C33 C36 = SparkFun-Capacitors; PROD_ID: CAP-00868
D1 D3 D5 D6 D8 D9 D11 D12 D14 D15 D17 D18 D20 D21 D23 D24 D26 D27 D29 D30 D32 D33 D35 D36 = SparkFun-DiscreteSemi; PROD_ID: DIO-08053
D2 D4 D7 D10 D13 D16 D19 D22 D25 D28 D31 D34 = SparkFun-LED; PROD_ID: DIO-00819
E$1 = SparkFun-Retired
E$4 E$5 FID1-FID24 LOGO1-LOGO24 = SparkFun-Aesthetics
JP1 JP6 JP9 JP12 JP15 JP18 JP21 JP24 JP27 JP30 JP33 JP36 = SparkFun-Connectors; PROD_ID: CONN-08106; SF_ID: PRT-12748
JP2 JP4 JP7 JP10 JP13 JP16 JP19 JP22 JP25 JP28 JP31 JP34 = SparkFun-Connectors; PROD_ID: CONN-11443
JP3 JP5 JP8 JP11 JP14 JP17 JP20 JP23 JP26 JP29 JP32 JP35 = template_temp
R1 R4 R9 R10 R15 R16 R21 R22 R27 R28 R33 R34 R39 R40 R45 R46 R51 R52 R57 R58 R63 R64 R69 R70 = SparkFun-Resistors; PROD_ID: RES-07856
R2 R7 R13 R19 R25 R31 R37 R43 R49 R55 R61 R67 = SparkFun-Resistors; PROD_ID: RES-00818
R3 R8 R14 R20 R26 R32 R38 R44 R50 R56 R62 R68 = SparkFun-Resistors; PROD_ID: RES-08296
R5 R6 R11 R12 R17 R18 R23 R24 R29 R30 R35 R36 R41 R42 R47 R48 R53 R54 R59 R60 R65 R66 R71 R72 = SparkFun-Resistors; PROD_ID: RES-00824
SJ1-SJ24 TP1-TP12 = SparkFun-Passives
U1 U4 U6 U8 U10 U12 U14 U16 U18 U20 U22 U24 = SparkFun-PowerIC; PROD_ID: IC-10399
U2 U3 U5 U7 U9 U11 U13 U15 U17 U19 U21 U23 = SparkFun-PowerIC; PROD_ID: IC-09995

## Nets
3.3V: C2.1 JP3.3V3 JP3.24 SJ2.2 U1.3
3.3V1: C6.1 JP5.3V3 JP5.24 SJ3.2 U4.3
3.3V2: C9.1 JP8.3V3 JP8.24 SJ5.2 U6.3
3.3V3: C12.1 JP11.3V3 JP11.24 SJ7.2 U8.3
3.3V4: C15.1 JP14.3V3 JP14.24 SJ9.2 U10.3
3.3V5: C18.1 JP17.3V3 JP17.24 SJ11.2 U12.3
3.3V6: C21.1 JP20.3V3 JP20.24 SJ13.2 U14.3
3.3V7: C24.1 JP23.3V3 JP23.24 SJ15.2 U16.3
3.3V8: C27.1 JP26.3V3 JP26.24 SJ17.2 U18.3
3.3V9: C30.1 JP29.3V3 JP29.24 SJ19.2 U20.3
3.3V10: C33.1 JP32.3V3 JP32.24 SJ21.2 U22.3
3.3V11: C36.1 JP35.3V3 JP35.24 SJ23.2 U24.3
D1: JP5.19 JP5.D6 SJ4.1
D2: JP8.19 JP8.D6 SJ6.1
D3: JP11.19 JP11.D6 SJ8.1
D4: JP14.19 JP14.D6 SJ10.1
D5: JP17.19 JP17.D6 SJ12.1
D6: JP3.19 JP3.D6 SJ1.1
D7: JP20.19 JP20.D6 SJ14.1
D8: JP23.19 JP23.D6 SJ16.1
D9: JP26.19 JP26.D6 SJ18.1
D10: JP29.19 JP29.D6 SJ20.1
D11: JP32.19 JP32.D6 SJ22.1
D12: JP35.19 JP35.D6 SJ24.1
GND: C1.2 C2.2 C3.2 JP1.GND JP1.P$4 JP2.1 JP3.2 JP3.21 JP3.GND@0 JP3.GND@2 R1.1 R3.2 U1.1 U1.4 U1.EP U2.2
GND1: C4.2 C5.2 C6.2 JP4.1 JP5.2 JP5.21 JP5.GND@0 JP5.GND@2 JP6.GND JP6.P$4 R8.2 R10.1 U3.2 U4.1 U4.4 U4.EP
GND2: C7.2 C8.2 C9.2 JP7.1 JP8.2 JP8.21 JP8.GND@0 JP8.GND@2 JP9.GND JP9.P$4 R14.2 R16.1 U5.2 U6.1 U6.4 U6.EP
GND3: C10.2 C11.2 C12.2 JP10.1 JP11.2 JP11.21 JP11.GND@0 JP11.GND@2 JP12.GND JP12.P$4 R20.2 R22.1 U7.2 U8.1 U8.4 U8.EP
GND4: C13.2 C14.2 C15.2 JP13.1 JP14.2 JP14.21 JP14.GND@0 JP14.GND@2 JP15.GND JP15.P$4 R26.2 R28.1 U9.2 U10.1 U10.4 U10.EP
GND5: C16.2 C17.2 C18.2 JP16.1 JP17.2 JP17.21 JP17.GND@0 JP17.GND@2 JP18.GND JP18.P$4 R32.2 R34.1 U11.2 U12.1 U12.4 U12.EP
GND6: C19.2 C20.2 C21.2 JP19.1 JP20.2 JP20.21 JP20.GND@0 JP20.GND@2 JP21.GND JP21.P$4 R38.2 R40.1 U13.2 U14.1 U14.4 U14.EP
GND7: C22.2 C23.2 C24.2 JP22.1 JP23.2 JP23.21 JP23.GND@0 JP23.GND@2 JP24.GND JP24.P$4 R44.2 R46.1 U15.2 U16.1 U16.4 U16.EP
GND8: C25.2 C26.2 C27.2 JP25.1 JP26.2 JP26.21 JP26.GND@0 JP26.GND@2 JP27.GND JP27.P$4 R50.2 R52.1 U17.2 U18.1 U18.4 U18.EP
GND9: C28.2 C29.2 C30.2 JP28.1 JP29.2 JP29.21 JP29.GND@0 JP29.GND@2 JP30.GND JP30.P$4 R56.2 R58.1 U19.2 U20.1 U20.4 U20.EP
GND10: C31.2 C32.2 C33.2 JP31.1 JP32.2 JP32.21 JP32.GND@0 JP32.GND@2 JP33.GND JP33.P$4 R62.2 R64.1 U21.2 U22.1 U22.4 U22.EP
GND11: C34.2 C35.2 C36.2 JP34.1 JP35.2 JP35.21 JP35.GND@0 JP35.GND@2 JP36.GND JP36.P$4 R68.2 R70.1 U23.2 U24.1 U24.4 U24.EP
N$1: D2.A R2.2
N$2: D2.C U2.1
N$3: R3.1 U2.5
N$4: SJ1.2 U1.5
N$5: R4.1 U1.2
N$6: R1.2 U1.6
N$7: R5.2 SJ2.3
N$8: D1.A JP1.VIN0
N$9: R6.2 SJ2.1
N$12: D4.A R7.2
N$13: D4.C U3.1
N$14: R8.1 U3.5
N$15: R9.1 U4.2
N$16: R10.2 U4.6
N$17: SJ4.2 U4.5
N$18: D5.A JP6.VIN0
N$19: R11.2 SJ3.3
N$20: R12.2 SJ3.1
N$21: D7.A R13.2
N$22: D7.C U5.1
N$23: R14.1 U5.5
N$24: R15.1 U6.2
N$25: R16.2 U6.6
N$26: SJ6.2 U6.5
N$27: D8.A JP9.VIN0
N$28: R17.2 SJ5.3
N$29: R18.2 SJ5.1
N$30: D10.A R19.2
N$31: D10.C U7.1
N$32: R20.1 U7.5
N$33: R21.1 U8.2
N$34: R22.2 U8.6
N$35: SJ8.2 U8.5
N$36: D11.A JP12.VIN0
N$37: R23.2 SJ7.3
N$38: R24.2 SJ7.1
N$39: D13.A R25.2
N$40: D13.C U9.1
N$41: R26.1 U9.5
N$42: R27.1 U10.2
N$43: R28.2 U10.6
N$44: SJ10.2 U10.5
N$45: D14.A JP15.VIN0
N$46: R29.2 SJ9.3
N$47: R30.2 SJ9.1
N$48: D16.A R31.2
N$49: D16.C U11.1
N$50: R32.1 U11.5
N$51: R33.1 U12.2
N$52: R34.2 U12.6
N$53: SJ12.2 U12.5
N$54: D17.A JP18.VIN0
N$55: R35.2 SJ11.3
N$56: R36.2 SJ11.1
N$57: D19.A R37.2
N$58: D19.C U13.1
N$59: R38.1 U13.5
N$60: R39.1 U14.2
N$61: R40.2 U14.6
N$62: SJ14.2 U14.5
N$63: D20.A JP21.VIN0
N$64: R41.2 SJ13.3
N$65: R42.2 SJ13.1
N$66: D22.A R43.2
N$67: D22.C U15.1
N$68: R44.1 U15.5
N$69: R45.1 U16.2
N$70: R46.2 U16.6
N$71: SJ16.2 U16.5
N$72: D23.A JP24.VIN0
N$73: R47.2 SJ15.3
N$74: R48.2 SJ15.1
N$75: D25.A R49.2
N$76: D25.C U17.1
N$77: R50.1 U17.5
N$78: R51.1 U18.2
N$79: R52.2 U18.6
N$80: SJ18.2 U18.5
N$81: D26.A JP27.VIN0
N$82: R53.2 SJ17.3
N$83: R54.2 SJ17.1
N$84: D28.A R55.2
N$85: D28.C U19.1
N$86: R56.1 U19.5
N$87: R57.1 U20.2
N$88: R58.2 U20.6
N$89: SJ20.2 U20.5
N$90: D29.A JP30.VIN0
N$91: R59.2 SJ19.3
N$92: R60.2 SJ19.1
N$93: D31.A R61.2
N$94: D31.C U21.1
N$95: R62.1 U21.5
N$96: R63.1 U22.2
N$97: R64.2 U22.6
N$98: SJ22.2 U22.5
N$99: D32.A JP33.VIN0
N$100: R65.2 SJ21.3
N$101: R66.2 SJ21.1
N$102: D34.A R67.2
N$103: D34.C U23.1
N$104: R68.1 U23.5
N$105: R69.1 U24.2
N$106: R70.2 U24.6
N$107: SJ24.2 U24.5
N$108: D35.A JP36.VIN0
N$109: R71.2 SJ23.3
N$110: R72.2 SJ23.1
SCL: JP3.14 JP3.D1 R6.1 U1.7
SCL1: JP5.14 JP5.D1 R12.1 U4.7
SCL2: JP8.14 JP8.D1 R18.1 U6.7
SCL3: JP11.14 JP11.D1 R24.1 U8.7
SCL4: JP14.14 JP14.D1 R30.1 U10.7
SCL5: JP17.14 JP17.D1 R36.1 U12.7
SCL6: JP20.14 JP20.D1 R42.1 U14.7
SCL7: JP23.14 JP23.D1 R48.1 U16.7
SCL8: JP26.14 JP26.D1 R54.1 U18.7
SCL9: JP29.14 JP29.D1 R60.1 U20.7
SCL10: JP32.14 JP32.D1 R66.1 U22.7
SCL11: JP35.14 JP35.D1 R72.1 U24.7
SDA: JP3.13 JP3.D0 R5.1 U1.8
SDA1: JP5.13 JP5.D0 R11.1 U4.8
SDA2: JP8.13 JP8.D0 R17.1 U6.8
SDA3: JP11.13 JP11.D0 R23.1 U8.8
SDA4: JP14.13 JP14.D0 R29.1 U10.8
SDA5: JP17.13 JP17.D0 R35.1 U12.8
SDA6: JP20.13 JP20.D0 R41.1 U14.8
SDA7: JP23.13 JP23.D0 R47.1 U16.8
SDA8: JP26.13 JP26.D0 R53.1 U18.8
SDA9: JP29.13 JP29.D0 R59.1 U20.8
SDA10: JP32.13 JP32.D0 R65.1 U22.8
SDA11: JP35.13 JP35.D0 R71.1 U24.8
VBAT: C3.1 D3.A JP2.2 R4.2 TP1.P$1 U2.3
VBAT1: C5.1 D6.A JP4.2 R9.2 TP2.P$1 U3.3
VBAT2: C8.1 D9.A JP7.2 R15.2 TP3.P$1 U5.3
VBAT3: C11.1 D12.A JP10.2 R21.2 TP4.P$1 U7.3
VBAT4: C14.1 D15.A JP13.2 R27.2 TP5.P$1 U9.3
VBAT5: C17.1 D18.A JP16.2 R33.2 TP6.P$1 U11.3
VBAT6: C20.1 D21.A JP19.2 R39.2 TP7.P$1 U13.3
VBAT7: C23.1 D24.A JP22.2 R45.2 TP8.P$1 U15.3
VBAT8: C26.1 D27.A JP25.2 R51.2 TP9.P$1 U17.3
VBAT9: C29.1 D30.A JP28.2 R57.2 TP10.P$1 U19.3
VBAT10: C32.1 D33.A JP31.2 R63.2 TP11.P$1 U21.3
VBAT11: C35.1 D36.A JP34.2 R69.2 TP12.P$1 U23.3
VIN: C1.1 D1.C D3.C JP3.1 JP3.VIN R2.1 U2.4
VIN1: C4.1 D5.C D6.C JP5.1 JP5.VIN R7.1 U3.4
VIN2: C7.1 D8.C D9.C JP8.1 JP8.VIN R13.1 U5.4
VIN3: C10.1 D11.C D12.C JP11.1 JP11.VIN R19.1 U7.4
VIN4: C13.1 D14.C D15.C JP14.1 JP14.VIN R25.1 U9.4
VIN5: C16.1 D17.C D18.C JP17.1 JP17.VIN R31.1 U11.4
VIN6: C19.1 D20.C D21.C JP20.1 JP20.VIN R37.1 U13.4
VIN7: C22.1 D23.C D24.C JP23.1 JP23.VIN R43.1 U15.4
VIN8: C25.1 D26.C D27.C JP26.1 JP26.VIN R49.1 U17.4
VIN9: C28.1 D29.C D30.C JP29.1 JP29.VIN R55.1 U19.4
VIN10: C31.1 D32.C D33.C JP32.1 JP32.VIN R61.1 U21.4
VIN11: C34.1 D35.C D36.C JP35.1 JP35.VIN R67.1 U23.4